# Altium PCB PCB1.PcbDoc (part 1 of 4)
Units mm, origin at the board's own origin, x right, y up, seen from the top; angles counter-clockwise.
Board outline 55.25 x 50.25 mm, 10 copper layers (Top Layer, GND L2, Layer 3, GND L4, PWR L5, PWR L6, GND L7, Layer 8, GND L9, Bottom Layer), stack 1.615 mm thick; 238 components, 362 nets, 1809 pads, 129 vias.
Unrouted connection lines stored in the file: 1070.
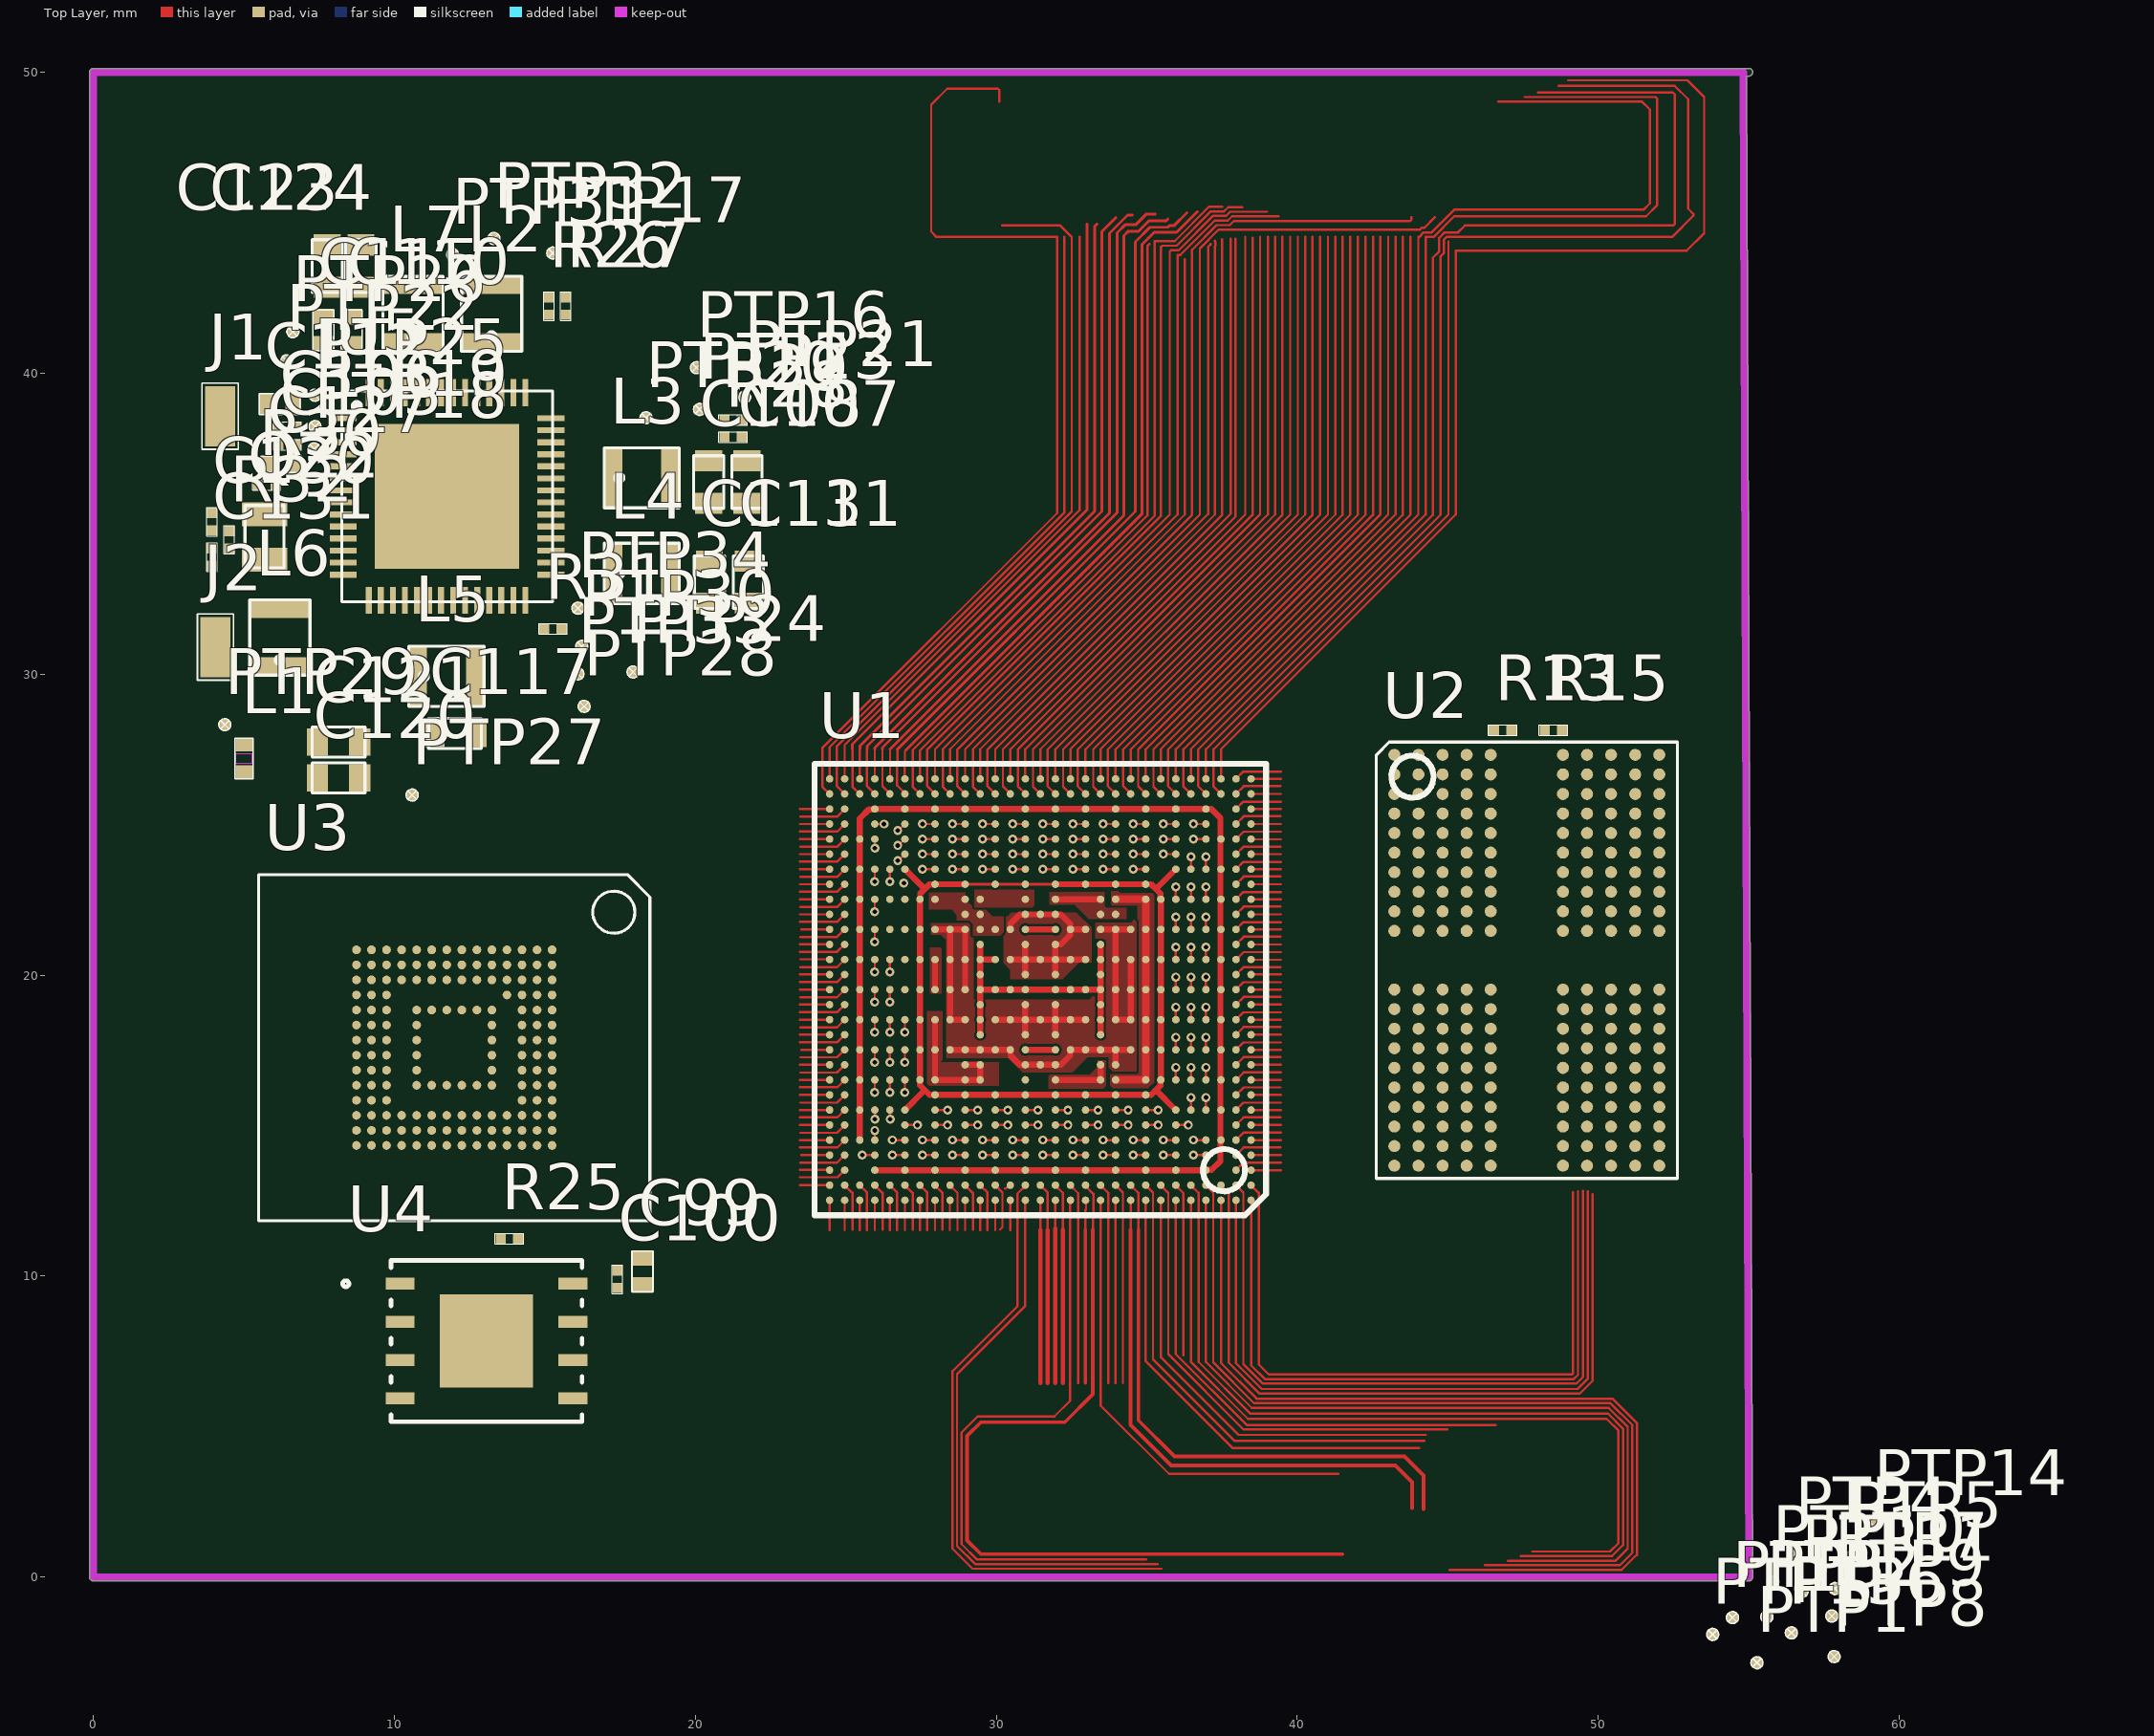
[diagram p0: Top Layer view]
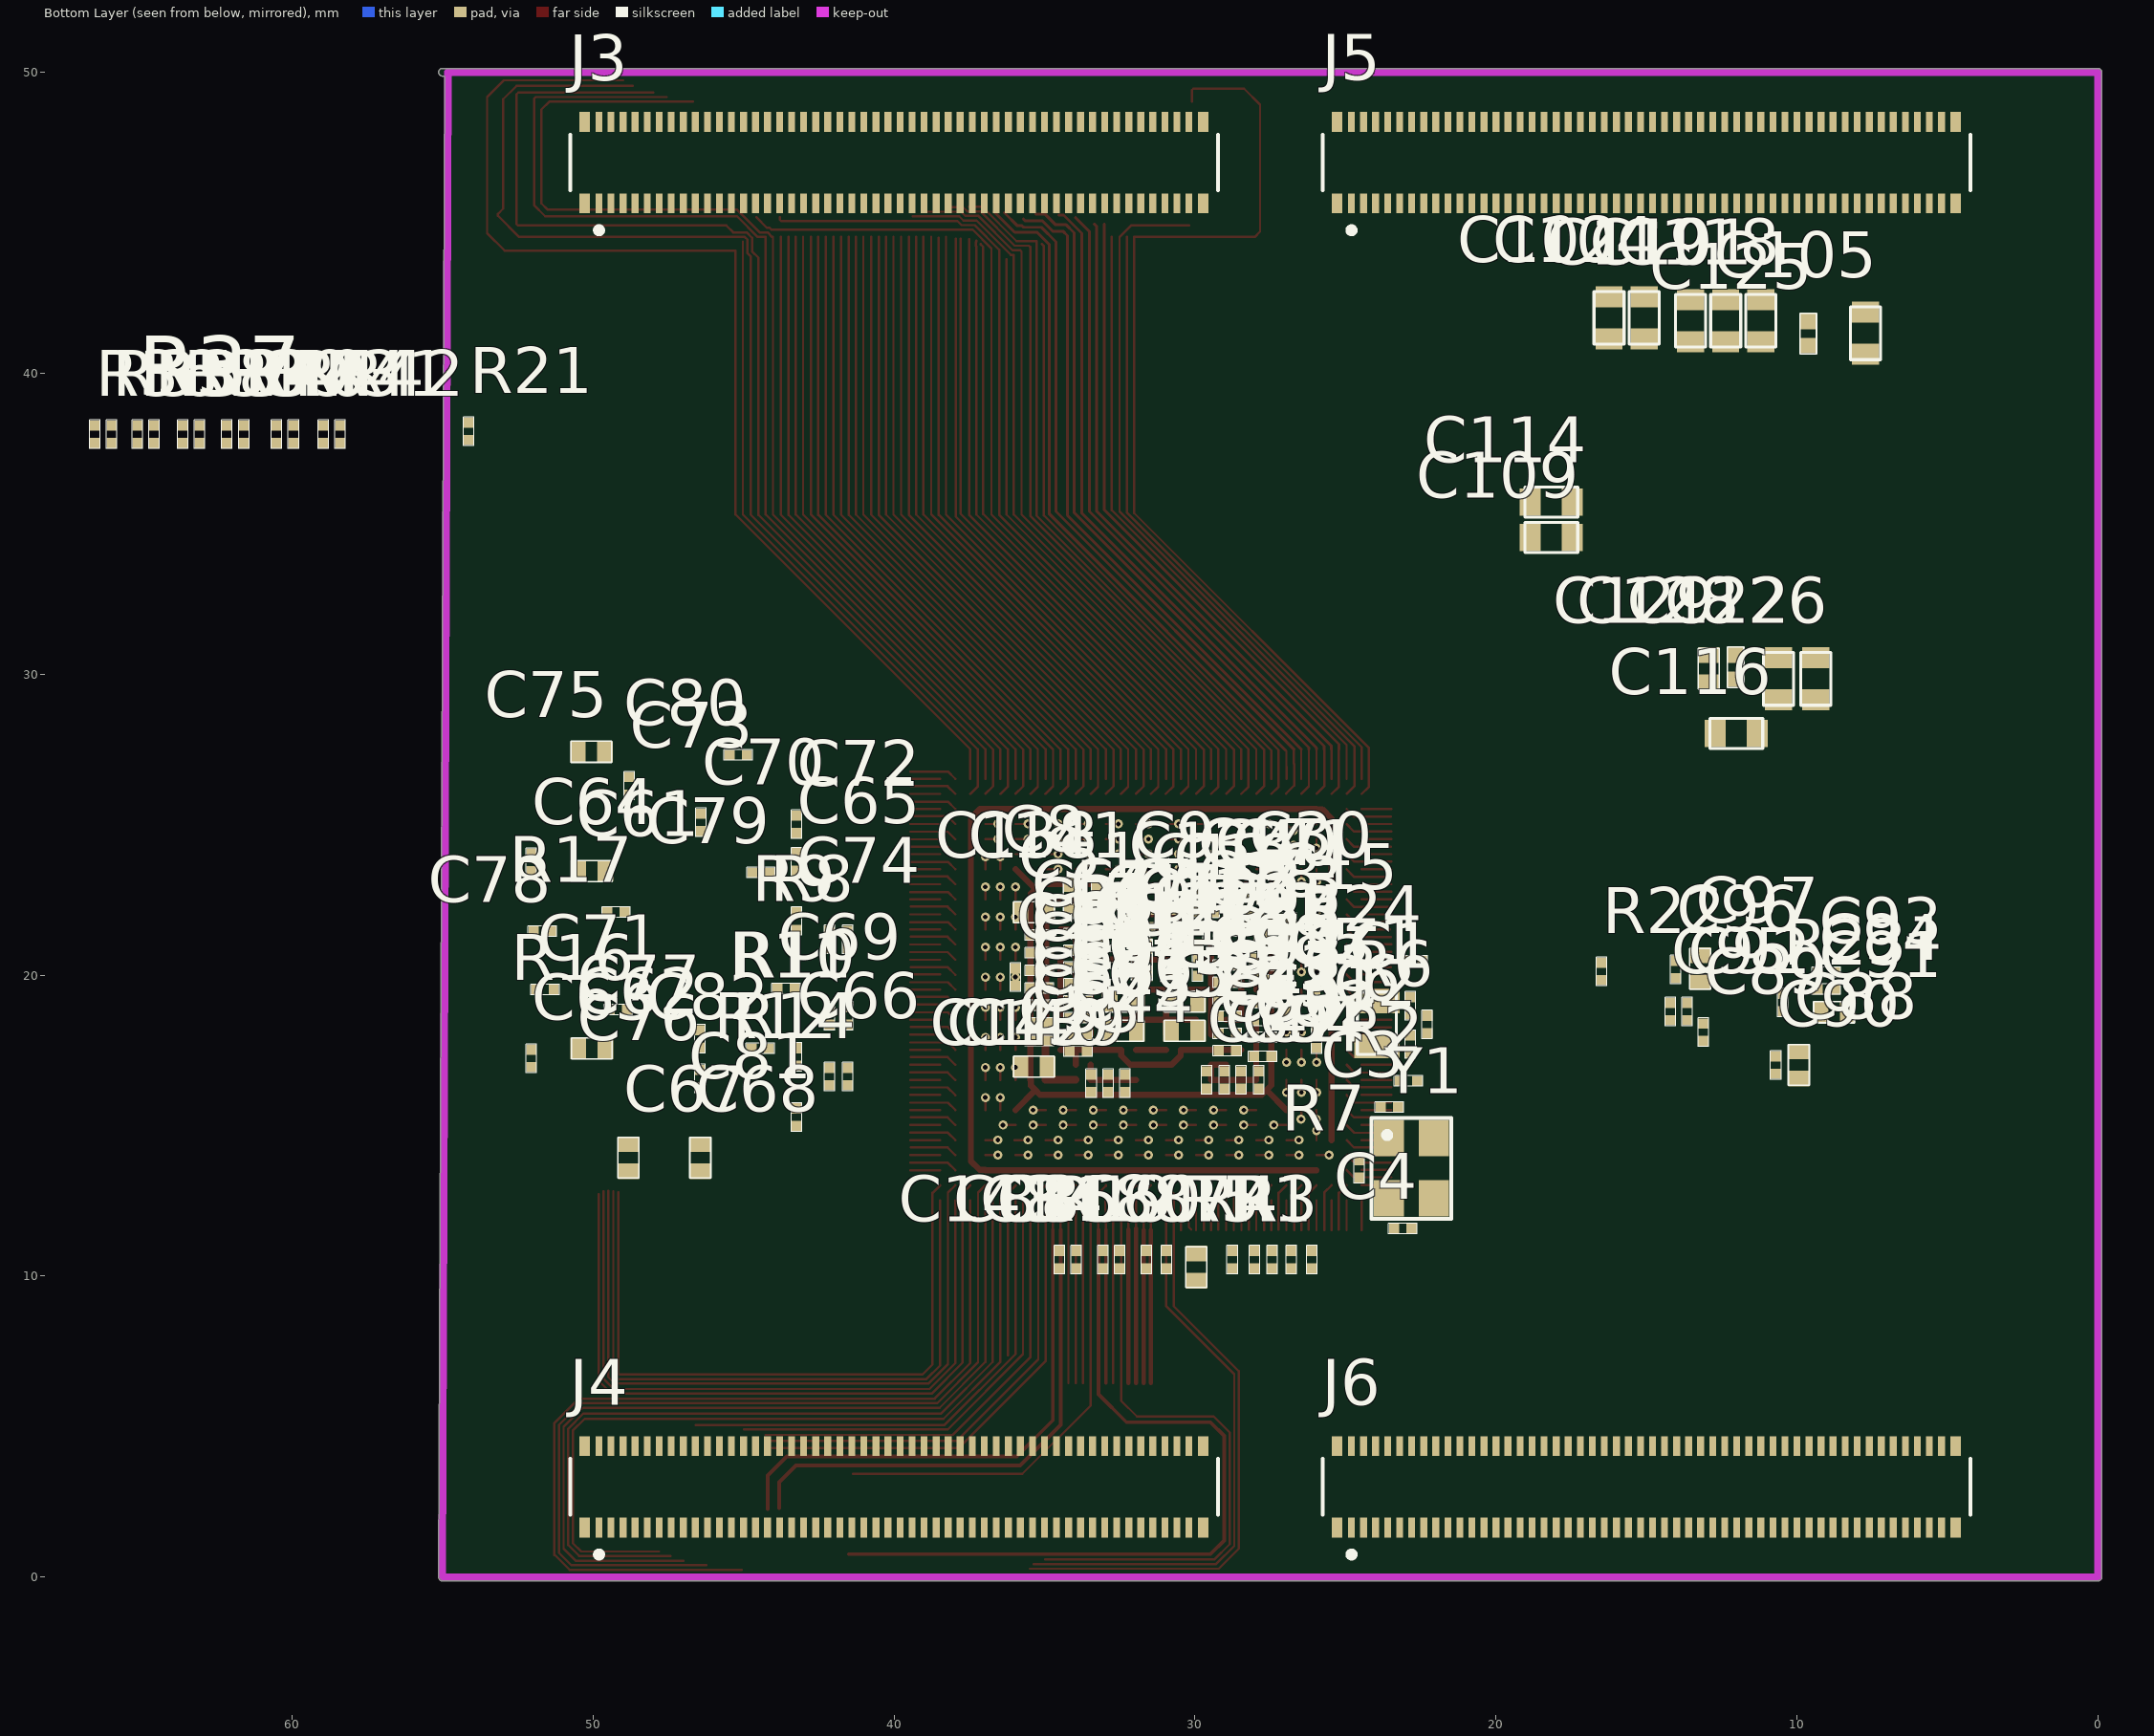
[diagram p1: Bottom Layer view, seen from below]

## Layer stack, top to bottom
Top Solder: solder mask 0.0102, Solder Resist, Dk 3.5
Top Layer: signal copper 0.035
Dielectric 2: prepreg 0.0784, PP-006, Dk 4.1
GND L2: signal copper 0.0152
Dielectric 3: core 0.25, PP-006, Dk 4.1
Layer 3: signal copper 0.0152
Dielectric 4: prepreg 0.0888, PP-006, Dk 4.1
GND L4: signal copper 0.0152
Dielectric 5: core 0.25, PP-006, Dk 4.1
PWR L5: signal copper 0.0152
Dielectric 1: prepreg 0.0888, FR-4, Dk 4.8
PWR L6: signal copper 0.0152
Dielectric 6: core 0.25, PP-006, Dk 4.1
GND L7: signal copper 0.0152
Dielectric 7: prepreg 0.0888, PP-006, Dk 4.1
Layer 8: signal copper 0.0152
Dielectric 8: core 0.25, PP-006, Dk 4.1
GND L9: signal copper 0.0152
Dielectric 9: prepreg 0.0784, PP-006, Dk 4.1
Bottom Layer: signal copper 0.035
Bottom Solder: solder mask 0.0102, Solder Resist, Dk 3.5

## Board outline
0,-0.127 cw(c0,0) -0.127,0 -0.127,50 cw(c0,50) 0,50.127 55,50.127 cw(c55,50) 55.127,50 cw(c55,50) 55,49.873 54.923,49.873 55.127,0.001 55.127,0 cw(c55,0) 55,-0.127

## Design rules (kind name [scope] priority, off if disabled: settings)
Clearance [All] p1: gap=0.076 ignorepadtopadclearanceinfootprint=FALSE except(0.2: Arc-Hole Track-Hole SMDPad-Hole THPad-Hole Via-Hole Fill-Hole Poly-Hole Region-Hole Text-Hole)
DiffPairsRouting DIFF_100 [InDifferentialPairClass('100')] p1: maxlimit=0.254 minlimit=0.127 mostfreqgap=0.254 toplayer_maxgap=0.127 toplayer_prefgap=0.127 toplayer_minwidth=0.094 toplayer_maxwidth=0.094 toplayer_prefwidth=0.094 midlayer2_maxgap=0.127 midlayer2_prefgap=0.127 midlayer2_minwidth=0.078 midlayer2_maxwidth=0.078 midlayer2_prefwidth=0.078 midlayer7_maxgap=0.127 midlayer7_prefgap=0.127 midlayer7_minwidth=0.078 midlayer7_maxwidth=0.078 midlayer7_prefwidth=0.078 bottomlayer_maxgap=0.127 bottomlayer_prefgap=0.127 bottomlayer_minwidth=0.094 bottomlayer_maxwidth=0.094 bottomlayer_prefwidth=0.094 impedanceprofiledriven=TRUE impedanceprofileid={C51C4587-37F8-4C0A-8CC7-DDA7A853E0E4} impedanceprofilevalue=100.000000 maxuncoupledlength=12.7
DiffPairsRouting DIFF_90 [InDifferentialPairClass('90')] p2: maxlimit=0.254 minlimit=0.127 mostfreqgap=0.254 toplayer_maxgap=0.127 toplayer_prefgap=0.127 toplayer_minwidth=0.121 toplayer_maxwidth=0.121 toplayer_prefwidth=0.121 midlayer2_maxgap=0.127 midlayer2_prefgap=0.127 midlayer2_minwidth=0.102 midlayer2_maxwidth=0.102 midlayer2_prefwidth=0.102 midlayer7_maxgap=0.127 midlayer7_prefgap=0.127 midlayer7_minwidth=0.102 midlayer7_maxwidth=0.102 midlayer7_prefwidth=0.102 bottomlayer_maxgap=0.127 bottomlayer_prefgap=0.127 bottomlayer_minwidth=0.121 bottomlayer_maxwidth=0.121 bottomlayer_prefwidth=0.121 impedanceprofiledriven=TRUE impedanceprofileid={1D29E53F-4908-4700-AD3D-521DF0D66675} impedanceprofilevalue=90.000000 maxuncoupledlength=12.7
DiffPairsRouting DIFF_85 [InDifferentialPairClass('85')] p3: maxlimit=0.254 minlimit=0.127 mostfreqgap=0.254 toplayer_maxgap=0.127 toplayer_prefgap=0.127 toplayer_minwidth=0.137 toplayer_maxwidth=0.137 toplayer_prefwidth=0.137 midlayer2_maxgap=0.127 midlayer2_prefgap=0.127 midlayer2_minwidth=0.117 midlayer2_maxwidth=0.117 midlayer2_prefwidth=0.117 midlayer7_maxgap=0.127 midlayer7_prefgap=0.127 midlayer7_minwidth=0.117 midlayer7_maxwidth=0.117 midlayer7_prefwidth=0.117 bottomlayer_maxgap=0.127 bottomlayer_prefgap=0.127 bottomlayer_minwidth=0.137 bottomlayer_maxwidth=0.137 bottomlayer_prefwidth=0.137 impedanceprofiledriven=TRUE impedanceprofileid={4B642B93-4FAB-42B8-9AE7-7EB7B3B48678} impedanceprofilevalue=85.000000 maxuncoupledlength=12.7
HoleSize [All] p1: absolutevalues=TRUE maxlimit=2.54 minlimit=0.15 maxpercent=80.000 minpercent=20.000
MatchedLengths "Schematic Matched Net Lengths_8" [InNetClass('USB')] p1: tolerance=0.3 checknetsindiffpair=TRUE checkdiffpairvsdiffpair=FALSE checkxsignals=FALSE checkothers=FALSE
MatchedLengths "Schematic Matched Net Lengths_1" [InNetClass('PCIe')] p2: tolerance=0.1 checknetsindiffpair=TRUE checkdiffpairvsdiffpair=FALSE checkxsignals=FALSE checkothers=FALSE
MatchedLengths "Schematic Matched Net Lengths" [InNetClass('HDMI')] p3: tolerance=0.1 checknetsindiffpair=TRUE checkdiffpairvsdiffpair=FALSE checkxsignals=FALSE checkothers=FALSE
PlaneClearance [All] p1: clearance=0.127
PlaneConnect [All] p1: planeconnectstyle=Direct reliefexpansion=0.508 reliefentries=4 reliefconductorwidth=0.254 reliefairgap=0.254
PolygonConnect [All] p1: connectstyle=Direct reliefconductorwidth=0.254 reliefentries=4 polygonreliefangle="90 Angle" airgapwidth=0.254
RoutingVias VIA_THRU [IsThruVia] p1: holewidth=0.2 width=0.4 viastyle="Through Hole" minholewidth=0.2 minwidth=0.4 maxholewidth=1 maxwidth=1.5
RoutingVias VIA_BURIED [IsBuriedVia] p2: holewidth=0.2 width=0.4 viastyle="Through Hole" minholewidth=0.2 minwidth=0.4 maxholewidth=0.5 maxwidth=1
RoutingVias VIA_MICRO [IsMicroVia] p3: holewidth=0.15 width=0.3 viastyle="Through Hole" minholewidth=0.15 minwidth=0.3 maxholewidth=0.15 maxwidth=0.3
SolderMaskExpansion [All] p1: expansion=0.102 istentingtop=FALSE
SupplyNets "Schematic Supply Nets_5" [InNet('5V0_SMPS')] p1: voltage=0.000
SupplyNets "Schematic Supply Nets_2" [InNet('VSYS_5V')] p2: voltage=0.000
SupplyNets "Schematic Supply Nets_1" [InNet('VSD_3V3')] p3: voltage=0.000
SupplyNets "Schematic Supply Nets_19" [InNet('NVCC_DRAM_1V1')] p4: voltage=0.000
SupplyNets "Schematic Supply Nets_18" [InNet('VDD_SNVS_0V8')] p5: voltage=0.000
SupplyNets "Schematic Supply Nets_17" [InNet('VDD_SOC')] p6: voltage=0.000
SupplyNets "Schematic Supply Nets_16" [InNet('VDD_3V3')] p7: voltage=0.000
SupplyNets "Schematic Supply Nets_15" [InNet('VDD_1V8')] p8: voltage=0.000
SupplyNets "Schematic Supply Nets_14" [InNet('GND')] p9: voltage=0.000
SupplyNets "Schematic Supply Nets_13" [InNet('VDD_ARM')] p10: voltage=0.000
SupplyNets "Schematic Supply Nets_12" [InNet('NVCC_SD2')] p11: voltage=0.000
SupplyNets "Schematic Supply Nets_11" [InNet('NVCC_SNVS_1V8')] p12: voltage=0.000
SupplyNets "Schematic Supply Nets_10" [InNet('VDDA_1V8')] p13: voltage=0.000
Width [All] p1: maxlimit=1.27 minlimit=0.076 preferedwidth=0.089
26 further rules are at their usual default settings.

## Classes and differential pairs
differential pair class 100: **LAN2_TXRXA **LAN2_TXRXB **LAN2_TXRXC **LAN2_TXRXD *LAN1_TXRXA *LAN1_TXRXB *LAN1_TXRXC *LAN1_TXRXD *LAN2_TXRXA *LAN2_TXRXB *LAN2_TXRXC *LAN2_TXRXD HDMI_TX0 HDMI_TX1 HDMI_TX2 HDMI_TXC LAN1_TXRXA LAN1_TXRXB LAN1_TXRXC LAN1_TXRXD LAN2_TXRXA LAN2_TXRXB LAN2_TXRXC LAN2_TXRXD
differential pair class 90: *PER1_TX1 *PER1_TX2 *PER2_TX1 *PER2_TX2 *USB_mPCIe PER1_RX1 PER1_RX2 PER1_TX1 PER1_TX2 PER2_RX1 PER2_RX2 PER2_TX1 PER2_TX2 USB1_D USB1_RX USB1_TX USB2_D USB2_HUB_UP USB2_RX USB2_TX USB_hub2 USB_hub3 USB_mPCIe
differential pair class 85: *mPCIe_CON_CLK *mPCIe_RX *mPCIe_TX DRAM_CK_A DRAM_CK_B DRAM_SDQS0_A DRAM_SDQS0_B DRAM_SDQS1_A DRAM_SDQS1_B mPCIe_CON_CLK mPCIe_RX mPCIe_TX PCIE_CLK PCIE_RX PCIE_TX
net class USB: USB1_D_N USB1_D_P USB1_RX_N USB1_RX_P USB1_TX_N USB1_TX_P USB2_D_N USB2_D_P USB2_RX_N USB2_RX_P USB2_TX_N USB2_TX_P
net class SINGLE: DRAM_CA0_A DRAM_CA0_B DRAM_CA1_A DRAM_CA1_B DRAM_CA2_A DRAM_CA2_B DRAM_CA3_A DRAM_CA3_B DRAM_CA4_A DRAM_CA4_B DRAM_CA5_A DRAM_CA5_B DRAM_CKE0_A DRAM_CKE0_B DRAM_CKE1_A DRAM_CKE1_B DRAM_DATA0_A DRAM_DATA0_B DRAM_DATA1_A DRAM_DATA1_B DRAM_DATA2_A DRAM_DATA2_B DRAM_DATA3_A DRAM_DATA3_B DRAM_DATA4_A DRAM_DATA4_B DRAM_DATA5_A DRAM_DATA5_B DRAM_DATA6_A DRAM_DATA6_B DRAM_DATA7_A DRAM_DATA7_B DRAM_DATA8_A DRAM_DATA8_B DRAM_DATA9_A DRAM_DATA9_B DRAM_DATA10_A DRAM_DATA10_B DRAM_DATA11_A DRAM_DATA11_B DRAM_DATA12_A DRAM_DATA12_B DRAM_DATA13_A DRAM_DATA13_B DRAM_DATA14_A DRAM_DATA14_B DRAM_DATA15_A DRAM_DATA15_B DRAM_DMI0_A DRAM_DMI0_B DRAM_DMI1_A DRAM_DMI1_B DRAM_nCS0_A DRAM_nCS0_B DRAM_nCS1_A DRAM_nCS1_B
net class SDIO: SD1_CLK SD1_CMD SD1_DATA0 SD1_DATA1 SD1_DATA2 SD1_DATA3 SD1_DATA4 SD1_DATA5 SD1_DATA6 SD1_DATA7 SD1_STROBE SD2_CLK SD2_CMD SD2_DATA0 SD2_DATA1 SD2_DATA2 SD2_DATA3
net class PCIe: PCIE_CLK_N PCIE_CLK_P PCIE_RX_N PCIE_RX_P PCIE_TX_N PCIE_TX_P
net class HDMI: HDMI_TX0_N HDMI_TX0_P HDMI_TX1_N HDMI_TX1_P HDMI_TX2_N HDMI_TX2_P HDMI_TXC_N HDMI_TXC_P
net class DRAM: DRAM_CK_A_N DRAM_CK_A_P DRAM_CK_B_N DRAM_CK_B_P DRAM_SDQS0_A_N DRAM_SDQS0_A_P DRAM_SDQS0_B_N DRAM_SDQS0_B_P DRAM_SDQS1_A_N DRAM_SDQS1_A_P DRAM_SDQS1_B_N DRAM_SDQS1_B_P
component class Interconnect: J3 J4 J5 J6
component class IMX8_PHY: C83 C84 C85 C143 R18 R19
component class IMX8_IO: C1 C2 C3 C4 PTP1 PTP2 PTP3 PTP4 PTP5 QZ1 R1 R2 R3 R4 R5 R6 R7 Y1
component class IMX8_INTERFACE: R33 R34 R35 R36 R37 R38 R39 R40 R41 R42 R43 R44
component class IMX8_DISPLAY: C87 R21
net class SEC: I2C1_SCL I2C1_SDA SD3_CLK SD3_CMD SD3_DATA0 SD3_DATA1 SD3_DATA2 SD3_DATA3 SD3_DATA4 SD3_DATA5 SD3_DATA6 SD3_DATA7
component class IMX8_LPDDR4: C61 C62 C63 C64 C65 C66 C67 C68 C69 C70 C71 C72 C73 C74 C75 C76 C77 C78 C79 C80 C81 C82 CR? F? PTP6 PTP7 PTP8 PTP9 PTP10 PTP11 R8 R9 R10 R11 R12 R13 R14 R15 R16 R17 U1 U2
component class IMX8_PMIC: C101 C102 C103 C104 C105 C106 C107 C108 C109 C110 C111 C112 C113 C114 C115 C116 C117 C118 C119 C120 C121 C122 C123 C124 C125 C126 C127 C128 C129 C130 C131 J1 J2 L1 L2 L3 L4 L5 L6 L7 PTP16 PTP17 PTP18 PTP19 PTP20 PTP21 PTP22 PTP23 PTP24 PTP25 PTP26 PTP27 PTP28 PTP29 PTP30 PTP31 PTP32 PTP33 PTP34 QZ2 R26 R27 R28 R29 R30 R31 R32 U5
component class IMX8_eMMC: C88 C89 C90 C91 C92 C93 C94 C95 C96 C97 C98 C99 C100 PTP14 PTP15 R22 R23 R24 R25 U3 U4
component class IMX8_PWR: C5 C6 C7 C8 C9 C10 C11 C12 C13 C14 C15 C16 C17 C18 C19 C20 C21 C22 C23 C24 C25 C26 C27 C28 C29 C30 C31 C32 C33 C34 C35 C36 C37 C38 C39 C40 C41 C42 C43 C44 C45 C46 C47 C48 C49 C50 C51 C52 C53 C54 C55 C56 C57 C58 C59 C60 C132 C133 C134 C135 C136 C137 C138 C139 C140 C141 C142
differential pair USB2_TX: +USB2_TX_P -USB2_TX_N
differential pair USB2_RX: +USB2_RX_P -USB2_RX_N
differential pair USB1_TX: +USB1_TX_P -USB1_TX_N
differential pair USB1_RX: +USB1_RX_P -USB1_RX_N
differential pair PCIE_TX: +PCIE_TX_P -PCIE_TX_N
differential pair PCIE_RX: +PCIE_RX_P -PCIE_RX_N
differential pair USB2_D: +USB2_D_P -USB2_D_N
differential pair USB1_D: +USB1_D_P -USB1_D_N
differential pair HDMI_TXC: +HDMI_TXC_P -HDMI_TXC_N
differential pair HDMI_TX2: +HDMI_TX2_P -HDMI_TX2_N
differential pair DRAM_SDQS1_B: +DRAM_SDQS1_B_P -DRAM_SDQS1_B_N
differential pair DRAM_SDQS1_A: +DRAM_SDQS1_A_P -DRAM_SDQS1_A_N
differential pair DRAM_SDQS0_A: +DRAM_SDQS0_A_P -DRAM_SDQS0_A_N
differential pair DRAM_CK_A: +DRAM_CK_A_P -DRAM_CK_A_N
differential pair PCIE_CLK: +PCIE_CLK_P -PCIE_CLK_N
differential pair HDMI_TX1: +HDMI_TX1_P -HDMI_TX1_N
differential pair HDMI_TX0: +HDMI_TX0_P -HDMI_TX0_N
differential pair DRAM_SDQS0_B: +DRAM_SDQS0_B_P -DRAM_SDQS0_B_N
differential pair DRAM_CK_B: +DRAM_CK_B_P -DRAM_CK_B_N

## Components (designator, comment, footprint, x,y, rotation, side; value= is the part's Value field where it differs from the comment)
C1 "CAP_0201_12pF_RF_MATCHING" CAP_0201_UN1Q 22.84,18.982 r90 bottom value=12pF
C2 "CAP_0201_12pF_RF_MATCHING" CAP_0201_UN1Q 22.84,17.701 r90 bottom value=12pF
C3 "CAP_0201_12pF_RF_MATCHING" CAP_0201_UN1Q 23.536,15.618 r180 bottom value=12pF
C4 "CAP_0201_12pF_RF_MATCHING" CAP_0201_UN1Q 23.094,11.58 r0 bottom value=12pF
C5 "CAP_0201_1uF_X6S" CAP_0201_UN1Q 26.961,19.105 r90 bottom value=1uF
C6 "CAP_0201_1uF_X6S" CAP_0201_UN1Q 25.951,17.872 r90 bottom value=1uF
C7 "CAP_0201_1uF_X6S" CAP_0201_UN1Q 27.881,16.511 r90 bottom value=1uF
C8 "CAP_0402_10u_X6S" CAP_0402_H09W07_UN1Q 34.028,22.571 r270 bottom value=10uF
C9 "CAP_0201_220n_10V_X6S" CAP_0201_UN1Q 32.097,22.622 r270 bottom value=220nF
C10 "CAP_0402_10u_X6S" CAP_0402_H09W07_UN1Q 31.767,20.514 r90 bottom value=10uF
C11 "CAP_0201_1uF_X6S" CAP_0201_UN1Q 32.783,20.031 r180 bottom value=1uF
C12 "CAP_0201_1uF_X6S" CAP_0201_UN1Q 32.783,20.59 r180 bottom value=1uF
C13 "CAP_0201_1uF_X6S" CAP_0201_UN1Q 31.504,21.886 r90 bottom value=1uF
C14 "CAP_0201_1uF_X6S" CAP_0201_UN1Q 32.783,21.174 r180 bottom value=1uF
C15 "CAP_0201_220n_10V_X6S" CAP_0201_UN1Q 27.094,21.886 r180 bottom value=220nF
C16 "CAP_0402_10u_X6S" CAP_0402_H09W07_UN1Q 30.726,20.514 r90 bottom value=10uF
C17 "CAP_0201_1uF_X6S" CAP_0201_UN1Q 29.913,22.394 r270 bottom value=1uF
C18 "CAP_0201_1uF_X6S" CAP_0201_UN1Q 29.913,21.327 r90 bottom value=1uF
C19 "CAP_0201_1uF_X6S" CAP_0201_UN1Q 30.726,21.886 r90 bottom value=1uF
C20 "CAP_0201_1uF_X6S" CAP_0201_UN1Q 29.913,20.26 r90 bottom value=1uF
C21 "CAP_0201_1uF_X6S" CAP_0201_UN1Q 35.967,19.936 r270 bottom value=1uF
C22 "CAP_0402_10u_X6S" CAP_0402_H09W07_UN1Q 30.345,18.152 r0 bottom value=10uF
C23 "CAP_0201_1uF_X6S" CAP_0201_UN1Q 28.922,21.454 r180 bottom value=1uF
C24 "CAP_0201_1uF_X6S" CAP_0201_UN1Q 28.922,20.326 r180 bottom value=1uF
C25 "CAP_0201_1uF_X6S" CAP_0201_UN1Q 28.922,20.89 r180 bottom value=1uF
C26 "CAP_0402_10u_X6S" CAP_0402_H09W07_UN1Q 30.345,19.117 r0 bottom value=10uF
C27 "CAP_0201_1uF_X6S" CAP_0201_UN1Q 28.922,18.634 r180 bottom value=1uF
C28 "CAP_0201_1uF_X6S" CAP_0201_UN1Q 28.922,19.198 r180 bottom value=1uF
C29 "CAP_0201_1uF_X6S" CAP_0201_UN1Q 28.922,19.762 r180 bottom value=1uF
C30 "CAP_0402_10u_X6S" CAP_0402_H09W07_UN1Q 28.033,22.368 r270 bottom value=10uF
C31 "CAP_0201_1uF_X6S" CAP_0201_UN1Q 27.745,17.933 r0 bottom value=1uF
C32 "CAP_0201_1uF_X6S" CAP_0201_UN1Q 27.745,17.298 r0 bottom value=1uF
C33 "CAP_0201_1uF_X6S" CAP_0201_UN1Q 27.745,18.492 r0 bottom value=1uF
C34 "CAP_0201_1uF_X6S" CAP_0201_UN1Q 28.465,16.511 r90 bottom value=1uF
C35 "CAP_0402_10u_X6S" CAP_0402_H09W07_UN1Q 32.377,18.152 r180 bottom value=10uF
C36 "CAP_0201_1uF_X6S" CAP_0201_UN1Q 33.875,20.26 r0 bottom value=1uF
C37 "CAP_0201_1uF_X6S" CAP_0201_UN1Q 33.875,19.142 r0 bottom value=1uF
C38 "CAP_0201_1uF_X6S" CAP_0201_UN1Q 33.875,19.701 r0 bottom value=1uF
C39 "CAP_0201_1uF_X6S" CAP_0201_UN1Q 29.608,16.511 r90 bottom value=1uF
C40 "CAP_0201_1uF_X6S" CAP_0201_UN1Q 29.354,22.368 r270 bottom value=1uF
C41 "CAP_0201_1uF_X6S" CAP_0201_UN1Q 28.795,22.368 r270 bottom value=1uF
C42 "CAP_0201_1uF_X6S" CAP_0201_UN1Q 29.024,16.511 r90 bottom value=1uF
C43 "CAP_0402_10u_X6S" CAP_0402_H09W07_UN1Q 32.377,19.117 r180 bottom value=10uF
C44 "CAP_0201_1uF_X6S" CAP_0201_UN1Q 33.875,17.466 r0 bottom value=1uF
C45 "CAP_0201_1uF_X6S" CAP_0201_UN1Q 33.875,18.025 r0 bottom value=1uF
C46 "CAP_0201_1uF_X6S" CAP_0201_UN1Q 33.875,18.584 r0 bottom value=1uF
C47 "CAP_0201_1uF_X6S" CAP_0201_UN1Q 33.875,21.378 r0 bottom value=1uF
C48 "CAP_0201_1uF_X6S" CAP_0201_UN1Q 28.922,18.05 r180 bottom value=1uF
C49 "CAP_0201_1uF_X6S" CAP_0201_UN1Q 33.875,20.819 r0 bottom value=1uF
C50 "CAP_0201_1uF_X6S" CAP_0201_UN1Q 28.922,17.481 r180 bottom value=1uF
C51 "CAP_0402_10u_X6S" CAP_0402_H09W07_UN1Q 35.349,22.089 r180 bottom value=10uF
C52 "CAP_0201_1uF_X6S" CAP_0201_UN1Q 35.168,17.819 r180 bottom value=1uF
C53 "CAP_0201_1uF_X6S" CAP_0201_UN1Q 35.168,20.156 r180 bottom value=1uF
C54 "CAP_0201_1uF_X6S" CAP_0201_UN1Q 35.168,19.572 r180 bottom value=1uF
C55 "CAP_0402_10u_X6S" CAP_0402_H09W07_UN1Q 35.349,16.958 r180 bottom value=10uF
C56 "CAP_0201_1uF_X6S" CAP_0201_UN1Q 35.168,18.404 r180 bottom value=1uF
C57 "CAP_0201_1uF_X6S" CAP_0201_UN1Q 35.168,21.325 r180 bottom value=1uF
C58 "CAP_0201_1uF_X6S" CAP_0201_UN1Q 35.168,20.74 r180 bottom value=1uF
C59 "CAP_0201_1uF_X6S" CAP_0201_UN1Q 35.168,18.988 r180 bottom value=1uF
C60 "CAP_0402_4u7_10V_X6S" CAP_0402_H09W07_UN1Q 29.952,10.299 r90 bottom value=4.7uF
C61 "CAP_0402_10u_X6S" CAP_0402_H09W07_UN1Q 50.041,23.458 r0 bottom value=10uF
C62 "CAP_0402_10u_X6S" CAP_0402_H09W07_UN1Q 50.041,17.565 r0 bottom value=10uF
C63 "CAP_0201_1uF_X6S" CAP_0201_UN1Q 52.048,17.235 r90 bottom value=1uF
C64 "CAP_0201_1uF_X6S" CAP_0201_UN1Q 52.048,23.747 r270 bottom value=1uF
C65 "CAP_0201_1uF_X6S" CAP_0201_UN1Q 43.234,23.762 r270 bottom value=1uF
C66 "CAP_0201_1uF_X6S" CAP_0201_UN1Q 43.234,17.285 r90 bottom value=1uF
C67 "CAP_0402_10u_X6S" CAP_0402_H09W07_UN1Q 48.822,13.933 r270 bottom value=10uF
C68 "CAP_0402_10u_X6S" CAP_0402_H09W07_UN1Q 46.435,13.933 r270 bottom value=10uF
C69 "CAP_0201_1uF_X6S" CAP_0201_UN1Q 43.59,19.546 r0 bottom value=1uF
C70 "CAP_0201_1uF_X6S" CAP_0201_UN1Q 46.409,25.073 r270 bottom value=1uF
C71 "CAP_0201_1uF_X6S" CAP_0201_UN1Q 51.591,19.521 r180 bottom value=1uF
C72 "CAP_0201_1uF_X6S" CAP_0201_UN1Q 43.234,25.007 r270 bottom value=1uF
C73 "CAP_0201_1uF_X6S" CAP_0201_UN1Q 48.797,26.292 r270 bottom value=1uF
C74 "CAP_0201_1uF_X6S" CAP_0201_UN1Q 43.234,21.796 r90 bottom value=1uF
C75 "CAP_0402_10u_X6S" CAP_0402_H09W07_UN1Q 50.049,27.42 r0 bottom value=10uF
C76 "CAP_0201_1uF_X6S" CAP_0201_UN1Q 46.435,16.564 r270 bottom value=1uF
C77 "CAP_0201_1uF_X6S" CAP_0201_UN1Q 46.435,17.88 r270 bottom value=1uF
C78 "CAP_0201_1uF_X6S" CAP_0201_UN1Q 51.678,21.451 r180 bottom value=1uF
C79 "CAP_0201_1uF_X6S" CAP_0201_UN1Q 44.417,23.407 r0 bottom value=1uF
C80 "CAP_0201_1uF_X6S" CAP_0201_UN1Q 45.175,27.318 r180 bottom value=1uF
C81 "CAP_0201_1uF_X6S" CAP_0201_UN1Q 43.234,15.279 r270 bottom value=1uF
C82 "CAP_0201_1uF_X6S" CAP_0201_UN1Q 44.443,17.565 r0 bottom value=1uF
C83 "CAP_0201_220n_10V_X6S" CAP_0201_UN1Q 33.94,10.549 r90 bottom value=220nF
C84 "CAP_0201_220n_10V_X6S" CAP_0201_UN1Q 33.051,10.549 r270 bottom value=220nF
C85 "CAP_0201_220n_10V_X6S" CAP_0201_UN1Q 32.492,10.549 r270 bottom value=220nF
C87 "CAP_0201_2n2" CAP_0201_UN1Q 28.758,10.549 r90 bottom value=2.2nF
C88 "CAP_0402_4u7_10V_X6S" CAP_0402_H09W07_UN1Q 9.939,17.013 r270 bottom value=4.7uF
C89 "CAP_0201_220n_10V_X6S" CAP_0201_UN1Q 13.114,18.105 r90 bottom value=220nF
C90 "CAP_0201_220n_10V_X6S" CAP_0201_UN1Q 10.701,17.013 r270 bottom value=220nF
C91 "CAP_0402_10u_X6S" CAP_0402_H09W07_UN1Q 8.771,18.765 r180 bottom value=10uF
C92 "CAP_0201_220n_10V_X6S" CAP_0201_UN1Q 13.648,18.791 r270 bottom value=220nF
C93 "CAP_0201_220n_10V_X6S" CAP_0201_UN1Q 9.021,20.086 r0 bottom value=220nF
C94 "CAP_0201_220n_10V_X6S" CAP_0201_UN1Q 9.021,19.527 r0 bottom value=220nF
C95 "CAP_0201_220n_10V_X6S" CAP_0201_UN1Q 14.207,18.791 r270 bottom value=220nF
C96 "CAP_0201_220n_10V_X6S" CAP_0201_UN1Q 14.029,20.188 r90 bottom value=220nF
C97 "CAP_0402_10u_X6S" CAP_0402_H09W07_UN1Q 13.216,20.213 r270 bottom value=10uF
C98 "CAP_0201_18p_RF_MATCHING" CAP_0201_UN1Q 25.71,19.504 r0 bottom value=18pF
C99 "CAP_0402_10u_X6S" CAP_0402_H09W07_UN1Q 18.245,10.151 r90 top value=10uF
C100 "CAP_0201_220n_10V_X6S" CAP_0201_UN1Q 17.407,9.901 r90 top value=220nF
C101 "CAP_0603_10u_10V_X7R" CAP_0603_UN1Q 12.37,41.744 r270 bottom value=10uF
C102 "CAP_0603_NA" CAP_0603_UN1Q 16.242,41.836 r270 bottom value=NA
C103 "CAP_0201_1uF_X6S" CAP_0201_UN1Q 6.446,37.629 r180 top value=1uF
C104 "CAP_0603_22u_6.3V_X6S" CAP_0603_UN1Q 15.074,41.836 r90 bottom value=22uF
C105 "CAP_0603_10u_10V_X7R" CAP_0603_UN1Q 7.722,41.326 r270 bottom value=10uF
C106 "CAP_0201_1uF_X6S" CAP_0201_UN1Q 6.446,38.213 r180 top value=1uF
C107 "CAP_0603_NA" CAP_0603_UN1Q 21.715,36.384 r270 top value=NA
C108 "CAP_0603_22u_6.3V_X6S" CAP_0603_UN1Q 20.445,36.384 r90 top value=22uF
C109 "CAP_0603_10u_10V_X7R" CAP_0603_UN1Q 18.161,34.544 r180 bottom value=10uF
C110 "CAP_0402_10u_X6S" CAP_0402_H09W07_UN1Q 8.585,41.427 r90 top value=10uF
C111 "CAP_0603_NA" CAP_0603_UN1Q 21.766,33.056 r90 top value=NA
C112 "CAP_0402_4u7_10V_X6S" CAP_0402_H09W07_UN1Q 6.196,38.975 r0 top value=4.7uF
C113 "CAP_0603_22u_6.3V_X6S" CAP_0603_UN1Q 20.47,33.056 r270 top value=22uF
C114 "CAP_0603_10u_10V_X7R" CAP_0603_UN1Q 18.161,35.712 r180 bottom value=10uF
C115 "CAP_0402_4u7_10V_X6S" CAP_0402_H09W07_UN1Q 7.645,41.427 r270 top value=4.7uF
C116 "CAP_0603_NA" CAP_0603_UN1Q 12.014,28.028 r180 bottom value=NA
C117 "CAP_0603_22u_6.3V_X6S" CAP_0603_UN1Q 12.014,28.028 r0 top value=22uF
C118 "CAP_0603_10u_10V_X7R" CAP_0603_UN1Q 11.199,41.744 r270 bottom value=10uF
C119 "CAP_0603_10u_10V_X7R" CAP_0603_UN1Q 13.538,41.744 r270 bottom value=10uF
C120 "CAP_0603_NA" CAP_0603_UN1Q 8.151,26.555 r180 top value=NA
C121 "CAP_0603_22u_6.3V_X6S" CAP_0603_UN1Q 8.151,27.748 r0 top value=22uF
C122 "CAP_0603_10u_10V_X7R" CAP_0603_UN1Q 10.617,29.845 r90 bottom value=10uF
C123 "CAP_0603_NA" CAP_0603_UN1Q 7.772,43.561 r270 top value=NA
C124 "CAP_0603_22u_6.3V_X6S" CAP_0603_UN1Q 8.89,43.561 r90 top value=22uF
C125 "CAP_0402_1uF_10V_X7R" CAP_0402_UN1Q 9.627,41.319 r270 bottom value=1uF
C126 "CAP_0603_10u_10V_X7R" CAP_0603_UN1Q 9.373,29.845 r90 bottom value=10uF
C127 "CAP_0402_1uF_10V_X7R" CAP_0402_UN1Q 6.246,36.969 r0 top value=1uF
C128 "CAP_0402_1uF_10V_X7R" CAP_0402_UN1Q 12.04,30.232 r90 bottom value=1uF
C129 "CAP_0402_4u7_10V_X6S" CAP_0402_H09W07_UN1Q 12.929,30.182 r270 bottom value=4.7uF
C130 "CAP_0201_12pF_RF_MATCHING" CAP_0201_UN1Q 3.939,35.069 r90 top value=12pF
C131 "CAP_0201_12pF_RF_MATCHING" CAP_0201_UN1Q 3.939,33.885 r270 top value=12pF
C132 "CAP_0402_10u_X6S" CAP_0402_H09W07_UN1Q 27.348,21.174 r0 bottom value=10uF
C133 "CAP_0201_1uF_X6S" CAP_0201_UN1Q 27.119,22.597 r0 bottom value=1uF
C134 "CAP_0201_1uF_X6S" CAP_0201_UN1Q 27.195,20.336 r180 bottom value=1uF
C135 "CAP_0201_1uF_X6S" CAP_0201_UN1Q 27.745,19.066 r0 bottom value=1uF
C136 "CAP_0201_1uF_X6S" CAP_0201_UN1Q 27.195,19.828 r180 bottom value=1uF
C137 "CAP_0201_1uF_X6S" CAP_0201_UN1Q 28.008,20.26 r90 bottom value=1uF
C138 "CAP_0201_1uF_X6S" CAP_0201_UN1Q 33.266,22.622 r270 bottom value=1uF
C139 "CAP_0201_1uF_X6S" CAP_0201_UN1Q 32.326,16.399 r90 bottom value=1uF
C140 "CAP_0201_1uF_X6S" CAP_0201_UN1Q 32.885,16.399 r90 bottom value=1uF
C141 "CAP_0201_1uF_X6S" CAP_0201_UN1Q 32.682,22.622 r270 bottom value=1uF
C142 "CAP_0201_1uF_X6S" CAP_0201_UN1Q 33.444,16.399 r90 bottom value=1uF
C143 "CAP_0201_220n_10V_X6S" CAP_0201_UN1Q 34.499,10.549 r270 bottom value=220nF
J1 "PAD 1 x 2 mm" TP_1X2MM_UN1Q 4.211,38.573 r0 top
J2 "PAD 1 x 2 mm" TP_1X2MM_UN1Q 4.059,30.902 r0 top
J3 "DF40C-100DP-0.4V(51)" HIROSE_DF40C-100DP-0.4V(51) 40,47 r180 bottom
J4 "DF40C-100DP-0.4V(51)" HIROSE_DF40C-100DP-0.4V(51) 40,3 r180 bottom
J5 "DF40C-100DP-0.4V(51)" HIROSE_DF40C-100DP-0.4V(51) 15,47 r180 bottom
J6 "DF40C-100DP-0.4V(51)" HIROSE_DF40C-100DP-0.4V(51) 15,3 r180 bottom locked
L1 "FERRITE_0402_BLM15KD" FERR_BLM15KD 5.004,27.203 r90 top value=30R@100MHz
L2 "IND_VLS2520_0u47" IND_VLS2520 13.233,41.976 r90 top value=0.47uH
L3 "IND_VLS2520_0u47" IND_VLS2520 18.222,36.525 r0 top value=0.47uH
L4 "IND_VLS2520_0u47" IND_VLS2520 18.222,33.35 r0 top value=0.47uH
L5 "IND_VLS2520_0u47" IND_VLS2520 11.733,29.933 r0 top value=0.47uH
L6 "IND_VLS2520_0u47" IND_VLS2520 6.198,31.217 r90 top value=0.47uH
L7 "IND_VLS2520_0u47" IND_VLS2520 10.617,41.976 r90 top value=0.47uH
PTP1 "PTP_0.4mm" PTP_0.4MM 55.27,-2.845 r90 top
PTP2 "PTP_0.4mm" PTP_0.4MM 55.601,-1.321 r90 top
PTP3 "PTP_0.4mm" PTP_0.4MM 54.458,-1.346 r90 top
PTP4 "PTP_0.4mm" PTP_0.4MM 56.54,0.787 r90 top
PTP5 "PTP_0.4mm" PTP_0.4MM 58.318,0.635 r90 top
PTP6 "PTP_0.4mm" PTP_0.4MM 56.413,-1.854 r90 top
PTP7 "PTP_0.4mm" PTP_0.4MM 57.861,-0.381 r90 top
PTP8 "PTP_0.4mm" PTP_0.4MM 57.836,-2.642 r90 top
PTP9 "PTP_0.4mm" PTP_0.4MM 57.76,-1.295 r90 top
PTP10 "PTP_0.4mm" PTP_0.4MM 55.804,-0.152 r90 top
PTP11 "PTP_0.4mm" PTP_0.4MM 56.769,-0.483 r90 top
PTP14 "PTP_0.4mm" PTP_0.4MM 59.157,1.702 r90 top
PTP15 "PTP_0.4mm" PTP_0.4MM 53.797,-1.905 r90 top
PTP16 "PTP_0.4mm" PTP_0.4MM 20.041,40.183 r90 top
PTP17 "PTP_0.4mm" PTP_0.4MM 15.265,43.993 r90 top
PTP18 "PTP_0.4mm" PTP_0.4MM 7.341,37.49 r90 top
PTP19 "PTP_0.4mm" PTP_0.4MM 7.366,38.227 r90 top
PTP20 "PTP_0.4mm" PTP_0.4MM 18.362,38.518 r90 top
PTP21 "PTP_0.4mm" PTP_0.4MM 21.639,39.204 r90 top
PTP22 "PTP_0.4mm" PTP_0.4MM 6.426,40.411 r90 top
PTP23 "PTP_0.4mm" PTP_0.4MM 20.14,38.797 r90 top
PTP24 "PTP_0.4mm" PTP_0.4MM 17.932,30.074 r90 top
PTP25 "PTP_0.4mm" PTP_0.4MM 7.366,39.268 r90 top
PTP26 "PTP_0.4mm" PTP_0.4MM 6.629,41.377 r90 top
PTP27 "PTP_0.4mm" PTP_0.4MM 10.592,25.984 r90 top
PTP28 "PTP_0.4mm" PTP_0.4MM 16.307,28.931 r90 top
PTP29 "PTP_0.4mm" PTP_0.4MM 4.369,28.321 r90 top
PTP30 "PTP_0.4mm" PTP_0.4MM 16.229,30.923 r90 top
PTP31 "PTP_0.4mm" PTP_0.4MM 11.938,43.942 r90 top
PTP32 "PTP_0.4mm" PTP_0.4MM 13.31,44.475 r90 top
PTP33 "PTP_0.4mm" PTP_0.4MM 16.102,30.009 r90 top
PTP34 "PTP_0.4mm" PTP_0.4MM 16.102,32.193 r90 top
QZ1 "XTAL_CM8V-T1A-32_768KHZ-9PF-20PPM-TA-QC" CM8V32768TA020125_MC 23.958,18.387 r270 bottom value="32.768 kHz"
QZ2 "XTAL_CM8V-T1A-32_768KHZ-9PF-20PPM-TA-QC" CM8V32768TA020125_MC 5.69,34.557 r270 top value="32.768 kHz"
R1 "RES_0201_NA" RES_0201_UN1Q 26.802,10.549 r90 bottom value=NA
R2 "RES_0201_100k" RES_0201_UN1Q 22.901,16.482 r0 bottom value=100k
R3 "RES_0201_100k" RES_0201_UN1Q 26.117,10.549 r90 bottom value=100k
R4 "RES_0201_10k" RES_0201_UN1Q 27.437,10.549 r270 bottom value=10k
R5 "RES_0201_NA" RES_0201_UN1Q 28.022,10.549 r270 bottom value=NA
R6 "RES_0201_4M7" RES_0201_UN1Q 22.281,18.361 r270 bottom value=4M7
R7 "RES_0201_510k" RES_0201_UN1Q 24.542,13.561 r270 bottom value=510k
R8 "RES_0201_NA" RES_0201_UN1Q 41.534,21.181 r90 bottom value=NA
R9 "RES_0201_NA" RES_0201_UN1Q 42.144,21.181 r90 bottom value=NA
R10 "RES_0201_NA" RES_0201_UN1Q 41.534,18.641 r270 bottom value=NA
R11 "RES_0201_NA" RES_0201_UN1Q 42.144,18.641 r270 bottom value=NA
R12 "RES_0201_10k" RES_0201_UN1Q 42.144,16.634 r90 bottom value=10k
R13 "RES_0201_240R" RES_0201_UN1Q 46.818,28.14 r180 top value=240R
R14 "RES_0201_240R" RES_0201_UN1Q 41.534,16.634 r90 bottom value=240R
R15 "RES_0201_240R" RES_0201_UN1Q 48.509,28.14 r0 top value=240R
R16 "RES_0201_NA" RES_0201_UN1Q 49.154,18.844 r180 bottom value=NA
R17 "RES_0201_NA" RES_0201_UN1Q 49.231,22.095 r180 bottom value=NA
R18 "RES_0201_200R" RES_0201_UN1Q 31.603,10.549 r90 bottom value=200R
R19 "RES_0201_8k2" RES_0201_UN1Q 30.943,10.549 r90 bottom value=8k2
R21 "RES_0201_8k2" RES_0201_UN1Q 54.133,38.072 r90 bottom value=8k2
R22 "RES_0201_NA" RES_0201_UN1Q 16.493,20.126 r90 bottom value=NA
R23 "RES_0201_NA" RES_0201_UN1Q 10.473,19.085 r90 bottom value=NA
R24 "RES_0201_NA" RES_0201_UN1Q 22.738,20.47 r180 bottom value=NA
R25 "10k" RES_0201_UN1Q 13.826,11.247 r0 top
R26 "RES_0201_NA" RES_0201_UN1Q 15.138,42.23 r90 top value=NA
R27 "RES_0201_0R" RES_0201_UN1Q 15.697,42.23 r90 top value=0R
R28 "RES_0201_NA" RES_0201_UN1Q 21.258,37.883 r0 top value=NA
R29 "RES_0201_0R" RES_0201_UN1Q 21.258,38.442 r0 top value=0R
R30 "RES_0201_100k" RES_0201_UN1Q 5.764,36.283 r0 top value=100k
R31 "RES_0201_100k" RES_0201_UN1Q 15.274,31.508 r180 top value=100k
R32 "RES_0201_NA" RES_0201_UN1Q 4.523,34.47 r270 top value=NA
R33 "RES_0201_4k7" RES_0201_UN1Q 63.632,37.97 r90 bottom value=4k7
R34 "RES_0201_4k7" RES_0201_UN1Q 63.074,37.97 r90 bottom value=4k7
R35 "RES_0201_4k7" RES_0201_UN1Q 65.995,37.97 r90 bottom value=4k7
R36 "RES_0201_4k7" RES_0201_UN1Q 66.553,37.97 r90 bottom value=4k7
R37 "RES_0201_4k7" RES_0201_UN1Q 65.131,37.97 r90 bottom value=4k7
R38 "RES_0201_4k7" RES_0201_UN1Q 64.572,37.97 r90 bottom value=4k7
R39 "RES_0201_4k7" RES_0201_UN1Q 62.159,37.97 r90 bottom value=4k7
R40 "RES_0201_4k7" RES_0201_UN1Q 61.6,37.97 r90 bottom value=4k7
R41 "RES_0201_4k7" RES_0201_UN1Q 58.959,37.97 r90 bottom value=4k7
R42 "RES_0201_4k7" RES_0201_UN1Q 58.4,37.97 r90 bottom value=4k7
R43 "RES_0201_4k7" RES_0201_UN1Q 60.508,37.97 r90 bottom value=4k7
R44 "RES_0201_4k7" RES_0201_UN1Q 59.949,37.97 r90 bottom value=4k7
U1 "MIMX8ML8CVNKZAB" BGA548C50P29X29_1500X1500X148 31.464,19.52 r180 top
U2 "MT53E2G32D4DE-046 AAT:C" BGA200C65P12X22_1000X1450X114 47.625,20.495 r0 top
U3 "SM662PBF BFS" GA153C50P14X14_1150X1300X120 11.993,17.592 r270 top
U4 "MT25QU256ABA1EW7-0SIT" W-PDFN-8MLP8_W7_MRN 13.064,7.843 r0 top
U5 "PCA9450_HVQFN56P_A" QFN57P40_700X700X100NXP 11.755,35.906 r0 top
Y1 "XTAL_24M_10ppm_9pF_+105C" XTAL_3225_EPSON 22.815,13.586 r180 bottom value=24MHz

## Footprints (in the part's own frame and the unit in brackets; to place one, negate y for a bottom-side part, rotate by r counter-clockwise, add the part's x,y. Pads: shape width x height; smd on the part's side, far side on the other; paste and mask are expansions set on the pad)
BGA200C65P12X22_1000X1450X114 [mm] "BGA200"
  round 0.4 smd paste+0 mask+0.05: A1(-4.4,6.825) A2(-3.6,6.825) A3(-2.8,6.825) A4(-2,6.825) A5(-1.2,6.825) A8(1.2,6.825) A9(2,6.825) A10(2.8,6.825) A11(3.6,6.825) A12(4.4,6.825) AA1(-4.4,-6.175) AA2(-3.6,-6.175) AA3(-2.8,-6.175) AA4(-2,-6.175) AA5(-1.2,-6.175) AA8(1.2,-6.175) AA9(2,-6.175) AA10(2.8,-6.175) AA11(3.6,-6.175) AA12(4.4,-6.175) AB1(-4.4,-6.825) AB2(-3.6,-6.825) AB3(-2.8,-6.825) AB4(-2,-6.825) AB5(-1.2,-6.825) AB8(1.2,-6.825) AB9(2,-6.825) AB10(2.8,-6.825) AB11(3.6,-6.825) AB12(4.4,-6.825) B1(-4.4,6.175) B2(-3.6,6.175) B3(-2.8,6.175) B4(-2,6.175) B5(-1.2,6.175) B8(1.2,6.175) B9(2,6.175) B10(2.8,6.175) B11(3.6,6.175) B12(4.4,6.175) C1(-4.4,5.525) C2(-3.6,5.525) C3(-2.8,5.525) C4(-2,5.525) C5(-1.2,5.525) C8(1.2,5.525) C9(2,5.525) C10(2.8,5.525) C11(3.6,5.525) C12(4.4,5.525) D1(-4.4,4.875) D2(-3.6,4.875) D3(-2.8,4.875) D4(-2,4.875) D5(-1.2,4.875) D8(1.2,4.875) D9(2,4.875) D10(2.8,4.875) D11(3.6,4.875) D12(4.4,4.875) E1(-4.4,4.225) E2(-3.6,4.225) E3(-2.8,4.225) E4(-2,4.225) E5(-1.2,4.225) E8(1.2,4.225) E9(2,4.225) E10(2.8,4.225) E11(3.6,4.225) E12(4.4,4.225) F1(-4.4,3.575) F2(-3.6,3.575) F3(-2.8,3.575) F4(-2,3.575) F5(-1.2,3.575) F8(1.2,3.575) F9(2,3.575) F10(2.8,3.575) F11(3.6,3.575) F12(4.4,3.575) G1(-4.4,2.925) G2(-3.6,2.925) G3(-2.8,2.925) G4(-2,2.925) G5(-1.2,2.925) G8(1.2,2.925) G9(2,2.925) G10(2.8,2.925) G11(3.6,2.925) G12(4.4,2.925) H1(-4.4,2.275) H2(-3.6,2.275) H3(-2.8,2.275) H4(-2,2.275) H5(-1.2,2.275) H8(1.2,2.275) H9(2,2.275) H10(2.8,2.275) H11(3.6,2.275) H12(4.4,2.275) J1(-4.4,1.625) J2(-3.6,1.625) J3(-2.8,1.625) J4(-2,1.625) J5(-1.2,1.625) J8(1.2,1.625) J9(2,1.625) J10(2.8,1.625) J11(3.6,1.625) J12(4.4,1.625) K1(-4.4,0.975) K2(-3.6,0.975) K3(-2.8,0.975) K4(-2,0.975) K5(-1.2,0.975) K8(1.2,0.975) K9(2,0.975) K10(2.8,0.975) K11(3.6,0.975) K12(4.4,0.975) N1(-4.4,-0.975) N2(-3.6,-0.975) N3(-2.8,-0.975) N4(-2,-0.975) N5(-1.2,-0.975) N8(1.2,-0.975) N9(2,-0.975) N10(2.8,-0.975) N11(3.6,-0.975) N12(4.4,-0.975) P1(-4.4,-1.625) P2(-3.6,-1.625) P3(-2.8,-1.625) P4(-2,-1.625) P5(-1.2,-1.625) P8(1.2,-1.625) P9(2,-1.625) P10(2.8,-1.625) P11(3.6,-1.625) P12(4.4,-1.625) R1(-4.4,-2.275) R2(-3.6,-2.275) R3(-2.8,-2.275) R4(-2,-2.275) R5(-1.2,-2.275) R8(1.2,-2.275) R9(2,-2.275) R10(2.8,-2.275) R11(3.6,-2.275) R12(4.4,-2.275) T1(-4.4,-2.925) T2(-3.6,-2.925) T3(-2.8,-2.925) T4(-2,-2.925) T5(-1.2,-2.925) T8(1.2,-2.925) T9(2,-2.925) T10(2.8,-2.925) T11(3.6,-2.925) T12(4.4,-2.925) U1(-4.4,-3.575) U2(-3.6,-3.575) U3(-2.8,-3.575) U4(-2,-3.575) U5(-1.2,-3.575) U8(1.2,-3.575) U9(2,-3.575) U10(2.8,-3.575) U11(3.6,-3.575) U12(4.4,-3.575) V1(-4.4,-4.225) V2(-3.6,-4.225) V3(-2.8,-4.225) V4(-2,-4.225) V5(-1.2,-4.225) V8(1.2,-4.225) V9(2,-4.225) V10(2.8,-4.225) V11(3.6,-4.225) V12(4.4,-4.225) W1(-4.4,-4.875) W2(-3.6,-4.875) W3(-2.8,-4.875) W4(-2,-4.875) W5(-1.2,-4.875) W8(1.2,-4.875) W9(2,-4.875) W10(2.8,-4.875) W11(3.6,-4.875) W12(4.4,-4.875) Y1(-4.4,-5.525) Y2(-3.6,-5.525) Y3(-2.8,-5.525) Y4(-2,-5.525) Y5(-1.2,-5.525) Y8(1.2,-5.525) Y9(2,-5.525) Y10(2.8,-5.525) Y11(3.6,-5.525) Y12(4.4,-5.525)
  silkscreen extent -5,-7.25 5,7.25, body extent -5,-7.25 5,7.25, height 1.14
BGA548C50P29X29_1500X1500X148 [mm] "BGA548"
  round 0.25 smd paste+0 mask+0.05: A1(-7,7) A2(-6.5,7) A3(-6,7) A4(-5.5,7) A5(-5,7) A6(-4.5,7) A7(-4,7) A8(-3.5,7) A9(-3,7) A10(-2.5,7) A11(-2,7) A12(-1.5,7) A13(-1,7) A14(-0.5,7) A15(0,7) A16(0.5,7) A17(1,7) A18(1.5,7) A19(2,7) A20(2.5,7) A21(3,7) A22(3.5,7) A23(4,7) A24(4.5,7) A25(5,7) A26(5.5,7) A27(6,7) A28(6.5,7) A29(7,7) AA1(-7,-3) AA2(-6.5,-3) AA3(-6,-3) AA4(-5.5,-3) AA5(-5,-3) AA6(-4.5,-3) AA7(-4,-3) AA8(-3.5,-3) AA10(-2.5,-3) AA11(-2,-3) AA14(-0.5,-3) AA16(0.5,-3) AA19(2,-3) AA20(2.5,-3) AA22(3.5,-3) AA23(4,-3) AA24(4.5,-3) AA25(5,-3) AA26(5.5,-3) AA27(6,-3) AA28(6.5,-3) AA29(7,-3) AB1(-7,-3.5) AB2(-6.5,-3.5) AB8(-3.5,-3.5) AB10(-2.5,-3.5) AB12(-1.5,-3.5) AB14(-0.5,-3.5) AB16(0.5,-3.5) AB18(1.5,-3.5) AB20(2.5,-3.5) AB22(3.5,-3.5) AB28(6.5,-3.5) AB29(7,-3.5) AC1(-7,-4) AC2(-6.5,-4) AC3(-6,-4) AC4(-5.5,-4) AC5(-5,-4) AC6(-4.5,-4) AC8(-3.5,-4) AC10(-2.5,-4) AC12(-1.5,-4) AC14(-0.5,-4) AC16(0.5,-4) AC18(1.5,-4) AC20(2.5,-4) AC22(3.5,-4) AC24(4.5,-4) AC25(5,-4) AC26(5.5,-4) AC27(6,-4) AC28(6.5,-4) AC29(7,-4) AD1(-7,-4.5) AD2(-6.5,-4.5) AD6(-4.5,-4.5) AD8(-3.5,-4.5) AD10(-2.5,-4.5) AD12(-1.5,-4.5) AD14(-0.5,-4.5) AD16(0.5,-4.5) AD18(1.5,-4.5) AD20(2.5,-4.5) AD22(3.5,-4.5) AD24(4.5,-4.5) AD28(6.5,-4.5) AD29(7,-4.5) AE1(-7,-5) AE2(-6.5,-5) AE3(-6,-5) AE4(-5.5,-5) AE6(-4.5,-5) AE8(-3.5,-5) AE10(-2.5,-5) AE12(-1.5,-5) AE14(-0.5,-5) AE16(0.5,-5) AE18(1.5,-5) AE20(2.5,-5) AE22(3.5,-5) AE24(4.5,-5) AE26(5.5,-5) AE27(6,-5) AE28(6.5,-5) AE29(7,-5) AF1(-7,-5.5) AF2(-6.5,-5.5) AF4(-5.5,-5.5) AF6(-4.5,-5.5) AF8(-3.5,-5.5) AF10(-2.5,-5.5) AF12(-1.5,-5.5) AF14(-0.5,-5.5) AF16(0.5,-5.5) AF18(1.5,-5.5) AF20(2.5,-5.5) AF22(3.5,-5.5) AF24(4.5,-5.5) AF26(5.5,-5.5) AF28(6.5,-5.5) AF29(7,-5.5) AG1(-7,-6) AG2(-6.5,-6) AG4(-5.5,-6) AG6(-4.5,-6) AG8(-3.5,-6) AG10(-2.5,-6) AG12(-1.5,-6) AG14(-0.5,-6) AG16(0.5,-6) AG18(1.5,-6) AG20(2.5,-6) AG22(3.5,-6) AG24(4.5,-6) AG26(5.5,-6) AG28(6.5,-6) AG29(7,-6) AH1(-7,-6.5) AH2(-6.5,-6.5) AH3(-6,-6.5) AH4(-5.5,-6.5) AH5(-5,-6.5) AH6(-4.5,-6.5) AH7(-4,-6.5) AH8(-3.5,-6.5) AH9(-3,-6.5) AH10(-2.5,-6.5) AH11(-2,-6.5) AH12(-1.5,-6.5) AH13(-1,-6.5) AH14(-0.5,-6.5) AH15(0,-6.5) AH16(0.5,-6.5) AH17(1,-6.5) AH18(1.5,-6.5) AH19(2,-6.5) AH20(2.5,-6.5) AH21(3,-6.5) AH22(3.5,-6.5) AH23(4,-6.5) AH24(4.5,-6.5) AH25(5,-6.5) AH26(5.5,-6.5) AH27(6,-6.5) AH28(6.5,-6.5) AH29(7,-6.5) AJ1(-7,-7) AJ2(-6.5,-7) AJ3(-6,-7) AJ4(-5.5,-7) AJ5(-5,-7) AJ6(-4.5,-7) AJ7(-4,-7) AJ8(-3.5,-7) AJ9(-3,-7) AJ10(-2.5,-7) AJ11(-2,-7) AJ12(-1.5,-7) AJ13(-1,-7) AJ14(-0.5,-7) AJ15(0,-7) AJ16(0.5,-7) AJ17(1,-7) AJ18(1.5,-7) AJ19(2,-7) AJ20(2.5,-7) AJ21(3,-7) AJ22(3.5,-7) AJ23(4,-7) AJ24(4.5,-7) AJ25(5,-7) AJ26(5.5,-7) AJ27(6,-7) AJ28(6.5,-7) AJ29(7,-7) B1(-7,6.5) B2(-6.5,6.5) B3(-6,6.5) B4(-5.5,6.5) B5(-5,6.5) B6(-4.5,6.5) B7(-4,6.5) B8(-3.5,6.5) B9(-3,6.5) B10(-2.5,6.5) B11(-2,6.5) B12(-1.5,6.5) B13(-1,6.5) B14(-0.5,6.5) B15(0,6.5) B16(0.5,6.5) B17(1,6.5) B18(1.5,6.5) B19(2,6.5) B20(2.5,6.5) B21(3,6.5) B22(3.5,6.5) B23(4,6.5) B24(4.5,6.5) B25(5,6.5) B26(5.5,6.5) B27(6,6.5) B28(6.5,6.5) B29(7,6.5) C1(-7,6) C2(-6.5,6) C4(-5.5,6) C6(-4.5,6) C8(-3.5,6) C10(-2.5,6) C12(-1.5,6) C14(-0.5,6) C16(0.5,6) C18(1.5,6) C20(2.5,6) C22(3.5,6) C24(4.5,6) C26(5.5,6) C28(6.5,6) C29(7,6) D1(-7,5.5) D2(-6.5,5.5) D4(-5.5,5.5) D6(-4.5,5.5) D8(-3.5,5.5) D10(-2.5,5.5) D12(-1.5,5.5) D14(-0.5,5.5) D16(0.5,5.5) D18(1.5,5.5) D20(2.5,5.5) D22(3.5,5.5) D24(4.5,5.5) D26(5.5,5.5) D28(6.5,5.5) D29(7,5.5) E1(-7,5) E2(-6.5,5) E3(-6,5) E4(-5.5,5) E6(-4.5,5) E8(-3.5,5) E10(-2.5,5) E12(-1.5,5) E14(-0.5,5) E16(0.5,5) E18(1.5,5) E20(2.5,5) E22(3.5,5) E24(4.5,5) E26(5.5,5) E27(6,5) E28(6.5,5) E29(7,5) F1(-7,4.5) F2(-6.5,4.5) F6(-4.5,4.5) F8(-3.5,4.5) F10(-2.5,4.5) F12(-1.5,4.5) F14(-0.5,4.5) F16(0.5,4.5) F18(1.5,4.5) F20(2.5,4.5) F22(3.5,4.5) F24(4.5,4.5) F28(6.5,4.5) F29(7,4.5) G1(-7,4) G2(-6.5,4) G3(-6,4) G4(-5.5,4) G5(-5,4) G6(-4.5,4) G8(-3.5,4) G10(-2.5,4) G12(-1.5,4) G14(-0.5,4) G16(0.5,4) G18(1.5,4) G20(2.5,4) G22(3.5,4) G24(4.5,4) G25(5,4) G26(5.5,4) G27(6,4) G28(6.5,4) G29(7,4) H1(-7,3.5) H2(-6.5,3.5) H8(-3.5,3.5) H10(-2.5,3.5) H12(-1.5,3.5) H14(-0.5,3.5) H16(0.5,3.5) H18(1.5,3.5) H20(2.5,3.5) H22(3.5,3.5) H28(6.5,3.5) H29(7,3.5) J1(-7,3) J2(-6.5,3) J3(-6,3) J4(-5.5,3) J5(-5,3) J6(-4.5,3) J7(-4,3) J8(-3.5,3) J10(-2.5,3) J11(-2,3) J14(-0.5,3) J16(0.5,3) J19(2,3) J20(2.5,3) J22(3.5,3) J23(4,3) J24(4.5,3) J25(5,3) J26(5.5,3) J27(6,3) J28(6.5,3) J29(7,3) K1(-7,2.5) K2(-6.5,2.5) K10(-2.5,2.5) K11(-2,2.5) K14(-0.5,2.5) K15(0,2.5) K16(0.5,2.5) K19(2,2.5) K20(2.5,2.5) K28(6.5,2.5) K29(7,2.5) L1(-7,2) L2(-6.5,2) L3(-6,2) L4(-5.5,2) L5(-5,2) L6(-4.5,2) L7(-4,2) L8(-3.5,2) L9(-3,2) L10(-2.5,2) L11(-2,2) L12(-1.5,2) L13(-1,2) L14(-0.5,2) L16(0.5,2) L17(1,2) L18(1.5,2) L19(2,2) L20(2.5,2) L21(3,2) L22(3.5,2) L23(4,2) L24(4.5,2) L25(5,2) L26(5.5,2) L27(6,2) L28(6.5,2) L29(7,2) M1(-7,1.5) M2(-6.5,1.5) M11(-2,1.5) M14(-0.5,1.5) M16(0.5,1.5) M19(2,1.5) M28(6.5,1.5) M29(7,1.5) N1(-7,1) N2(-6.5,1) N3(-6,1) N4(-5.5,1) N5(-5,1) N6(-4.5,1) N7(-4,1) N8(-3.5,1) N9(-3,1) N10(-2.5,1) N11(-2,1) N12(-1.5,1) N13(-1,1) N14(-0.5,1) N15(0,1) N16(0.5,1) N17(1,1) N18(1.5,1) N19(2,1) N20(2.5,1) N21(3,1) N22(3.5,1) N23(4,1) N24(4.5,1) N25(5,1) N26(5.5,1) N27(6,1) N28(6.5,1) N29(7,1) P1(-7,0.5) P2(-6.5,0.5) P11(-2,0.5) P14(-0.5,0.5) P16(0.5,0.5) P19(2,0.5) P28(6.5,0.5) P29(7,0.5) R1(-7,0) R2(-6.5,0) R3(-6,0) R4(-5.5,0) R5(-5,0) R6(-4.5,0) R7(-4,0) R8(-3.5,0) R9(-3,0) R10(-2.5,0) R11(-2,0) R12(-1.5,0) R13(-1,0) R14(-0.5,0) R16(0.5,0) R17(1,0) R18(1.5,0) R19(2,0) R20(2.5,0) R21(3,0) R22(3.5,0) R23(4,0) R24(4.5,0) R25(5,0) R26(5.5,0) R27(6,0) R28(6.5,0) R29(7,0) T1(-7,-0.5) T2(-6.5,-0.5) T11(-2,-0.5) T14(-0.5,-0.5) T16(0.5,-0.5) T19(2,-0.5) T28(6.5,-0.5) T29(7,-0.5) U1(-7,-1) U2(-6.5,-1) U3(-6,-1) U4(-5.5,-1) U5(-5,-1) U6(-4.5,-1) U7(-4,-1) U8(-3.5,-1) U9(-3,-1) U10(-2.5,-1) U11(-2,-1) U12(-1.5,-1) U13(-1,-1) U14(-0.5,-1) U15(0,-1) U16(0.5,-1) U17(1,-1) U18(1.5,-1) U19(2,-1) U20(2.5,-1) U21(3,-1) U22(3.5,-1) U23(4,-1) U24(4.5,-1) U25(5,-1) U26(5.5,-1) U27(6,-1) U28(6.5,-1) U29(7,-1) V1(-7,-1.5) V2(-6.5,-1.5) V11(-2,-1.5) V14(-0.5,-1.5) V16(0.5,-1.5) V19(2,-1.5) V28(6.5,-1.5) V29(7,-1.5) W1(-7,-2) W2(-6.5,-2) W3(-6,-2) W4(-5.5,-2) W5(-5,-2) W6(-4.5,-2) W7(-4,-2) W8(-3.5,-2) W9(-3,-2) W10(-2.5,-2) W11(-2,-2) W12(-1.5,-2) W13(-1,-2) W14(-0.5,-2) W16(0.5,-2) W17(1,-2) W18(1.5,-2) W19(2,-2) W20(2.5,-2) W21(3,-2) W22(3.5,-2) W23(4,-2) W24(4.5,-2) W25(5,-2) W26(5.5,-2) W27(6,-2) W28(6.5,-2) W29(7,-2) Y1(-7,-2.5) Y2(-6.5,-2.5) Y10(-2.5,-2.5) Y11(-2,-2.5) Y14(-0.5,-2.5) Y15(0,-2.5) Y16(0.5,-2.5) Y19(2,-2.5) Y20(2.5,-2.5) Y28(6.5,-2.5) Y29(7,-2.5)
  silkscreen extent -7.5,-7.5 7.5,7.5, body extent -7.5,-7.5 7.5,7.5, height 1.48
CAP_0201_UN1Q [mm] "Chip Capacitor 0201"
  rect 0.34x0.34 smd mask+0.05: 1(-0.29,0) 2(0.29,0)
  silkscreen extent -0.48,-0.18 0.48,0.18, body extent -0.3,-0.15 0.3,0.15, height 0.33
CAP_0402_H09W07_UN1Q [mm] "Chip Capacitor 0402 BIG"
  rect 0.52x0.7 smd paste+0 mask+0.05: 1(-0.45,0) 2(0.45,0)
  silkscreen extent -0.67,-0.35 0.67,0.35, body extent -0.55,-0.35 0.55,0.35, height 0.9
CAP_0402_UN1Q [mm] "Chip Capacitor 0402"
  rect 0.52x0.52 smd paste+0 mask+0.05: 1(-0.4,0) 2(0.4,0)
  silkscreen extent -0.67,-0.28 0.67,0.28, body extent -0.5,-0.25 0.5,0.25, height 0.6
CAP_0603_UN1Q [mm] "Chip Capacitor 0603"
  rect 0.7x0.9 smd paste+0 mask+0.05: 1(-0.7,0) 2(0.7,0)
  silkscreen extent -0.87,-0.5 0.87,0.5, body extent -0.8,-0.45 0.8,0.45, height 1
CM8V32768TA020125_MC [mm] "2.0 x 1.2 x 0.60 mm"
  rect 0.8x1.5 smd paste+0 mask+0.06: 1(-0.75,0) 2(0.75,0)
  silkscreen extent -1.05,-0.65 1.02,0.65, body extent -1,-0.6 1,0.6, height 0.63
FERR_BLM15KD [mm] "Chip Resistor, Body 1.0x0.5mm, IPC High Density"
  rect 0.45x0.55 smd mask+0.05: 1(-0.45,0) 2(0.45,0)
  Top Layer keep-out region: -0.152,-0.276 0.148,-0.276 0.148,0.274 -0.152,0.274
  silkscreen extent -0.67,-0.3 0.67,0.3, body extent -0.65,-0.27 0.65,0.28, height 0.55
GA153C50P14X14_1150X1300X120 [mm]
  round 0.29 smd paste+0 mask+0.05: A1(-3.25,3.25) A2(-2.75,3.25) A3(-2.25,3.25) A4(-1.75,3.25) A5(-1.25,3.25) A6(-0.75,3.25) A7(-0.25,3.25) A8(0.25,3.25) A9(0.75,3.25) A10(1.25,3.25) A11(1.75,3.25) A12(2.25,3.25) A13(2.75,3.25) A14(3.25,3.25) B1(-3.25,2.75) B2(-2.75,2.75) B3(-2.25,2.75) B4(-1.75,2.75) B5(-1.25,2.75) B6(-0.75,2.75) B7(-0.25,2.75) B8(0.25,2.75) B9(0.75,2.75) B10(1.25,2.75) B11(1.75,2.75) B12(2.25,2.75) B13(2.75,2.75) B14(3.25,2.75) C1(-3.25,2.25) C2(-2.75,2.25) C3(-2.25,2.25) C4(-1.75,2.25) C5(-1.25,2.25) C6(-0.75,2.25) C7(-0.25,2.25) C8(0.25,2.25) C9(0.75,2.25) C10(1.25,2.25) C11(1.75,2.25) C12(2.25,2.25) C13(2.75,2.25) C14(3.25,2.25) D1(-3.25,1.75) D2(-2.75,1.75) D3(-2.25,1.75) D4(-1.75,1.75) D12(2.25,1.75) D13(2.75,1.75) D14(3.25,1.75) E1(-3.25,1.25) E2(-2.75,1.25) E3(-2.25,1.25) E5(-1.25,1.25) E6(-0.75,1.25) E7(-0.25,1.25) E8(0.25,1.25) E9(0.75,1.25) E10(1.25,1.25) E12(2.25,1.25) E13(2.75,1.25) E14(3.25,1.25) F1(-3.25,0.75) F2(-2.75,0.75) F3(-2.25,0.75) F5(-1.25,0.75) F10(1.25,0.75) F12(2.25,0.75) F13(2.75,0.75) F14(3.25,0.75) G1(-3.25,0.25) G2(-2.75,0.25) G3(-2.25,0.25) G5(-1.25,0.25) G10(1.25,0.25) G12(2.25,0.25) G13(2.75,0.25) G14(3.25,0.25) H1(-3.25,-0.25) H2(-2.75,-0.25) H3(-2.25,-0.25) H5(-1.25,-0.25) H10(1.25,-0.25) H12(2.25,-0.25) H13(2.75,-0.25) H14(3.25,-0.25) J1(-3.25,-0.75) J2(-2.75,-0.75) J3(-2.25,-0.75) J5(-1.25,-0.75) J10(1.25,-0.75) J12(2.25,-0.75) J13(2.75,-0.75) J14(3.25,-0.75) K1(-3.25,-1.25) K2(-2.75,-1.25) K3(-2.25,-1.25) K5(-1.25,-1.25) K6(-0.75,-1.25) K7(-0.25,-1.25) K8(0.25,-1.25) K9(0.75,-1.25) K10(1.25,-1.25) K12(2.25,-1.25) K13(2.75,-1.25) K14(3.25,-1.25) L1(-3.25,-1.75) L2(-2.75,-1.75) L3(-2.25,-1.75) L12(2.25,-1.75) L13(2.75,-1.75) L14(3.25,-1.75) M1(-3.25,-2.25) M2(-2.75,-2.25) M3(-2.25,-2.25) M4(-1.75,-2.25) M5(-1.25,-2.25) M6(-0.75,-2.25) M7(-0.25,-2.25) M8(0.25,-2.25) M9(0.75,-2.25) M10(1.25,-2.25) M11(1.75,-2.25) M12(2.25,-2.25) M13(2.75,-2.25) M14(3.25,-2.25) N1(-3.25,-2.75) N2(-2.75,-2.75) N3(-2.25,-2.75) N4(-1.75,-2.75) N5(-1.25,-2.75) N6(-0.75,-2.75) N7(-0.25,-2.75) N8(0.25,-2.75) N9(0.75,-2.75) N10(1.25,-2.75) N11(1.75,-2.75) N12(2.25,-2.75) N13(2.75,-2.75) N14(3.25,-2.75) P1(-3.25,-3.25) P2(-2.75,-3.25) P3(-2.25,-3.25) P4(-1.75,-3.25) P5(-1.25,-3.25) P6(-0.75,-3.25) P7(-0.25,-3.25) P8(0.25,-3.25) P9(0.75,-3.25) P10(1.25,-3.25) P11(1.75,-3.25) P12(2.25,-3.25) P13(2.75,-3.25) P14(3.25,-3.25)
  silkscreen extent -5.75,-6.5 5.75,6.5, body extent -5.75,-6.5 5.75,6.5, height 1.21
HIROSE_DF40C-100DP-0.4V(51) [mm]
  rect 0.23x0.66 smd paste-1 mask+0.102: 1(-9.8,-1.355) 2(-9.8,1.355) 3(-9.4,-1.355) 4(-9.4,1.355) 5(-9,-1.355) 6(-9,1.355) 7(-8.6,-1.355) 8(-8.6,1.355) 9(-8.2,-1.355) 10(-8.2,1.355) 11(-7.8,-1.355) 12(-7.8,1.355) 13(-7.4,-1.355) 14(-7.4,1.355) 15(-7,-1.355) 16(-7,1.355) 17(-6.6,-1.355) 18(-6.6,1.355) 19(-6.2,-1.355) 20(-6.2,1.355) 21(-5.8,-1.355) 22(-5.8,1.355) 23(-5.4,-1.355) 24(-5.4,1.355) 25(-5,-1.355) 26(-5,1.355) 27(-4.6,-1.355) 28(-4.6,1.355) 29(-4.2,-1.355) 30(-4.2,1.355) 31(-3.8,-1.355) 32(-3.8,1.355) 33(-3.4,-1.355) 34(-3.4,1.355) 35(-3,-1.355) 36(-3,1.355) 37(-2.6,-1.355) 38(-2.6,1.355) 39(-2.2,-1.355) 40(-2.2,1.355) 41(-1.8,-1.355) 42(-1.8,1.355) 43(-1.4,-1.355) 44(-1.4,1.355) 45(-1,-1.355) 46(-1,1.355) 47(-0.6,-1.355) 48(-0.6,1.355) 49(-0.2,-1.355) 50(-0.2,1.355) 51(0.2,-1.355) 52(0.2,1.355) 53(0.6,-1.355) 54(0.6,1.355) 55(1,-1.355) 56(1,1.355) 57(1.4,-1.355) 58(1.4,1.355) 59(1.8,-1.355) 60(1.8,1.355) 61(2.2,-1.355) 62(2.2,1.355) 63(2.6,-1.355) 64(2.6,1.355) 65(3,-1.355) 66(3,1.355) 67(3.4,-1.355) 68(3.4,1.355) 69(3.8,-1.355) 70(3.8,1.355) 71(4.2,-1.355) 72(4.2,1.355) 73(4.6,-1.355) 74(4.6,1.355) 75(5,-1.355) 76(5,1.355) 77(5.4,-1.355) 78(5.4,1.355) 79(5.8,-1.355) 80(5.8,1.355) 81(6.2,-1.355) 82(6.2,1.355) 83(6.6,-1.355) 84(6.6,1.355) 85(7,-1.355) 86(7,1.355) 87(7.4,-1.355) 88(7.4,1.355) 89(7.8,-1.355) 90(7.8,1.355) 91(8.2,-1.355) 92(8.2,1.355) 93(8.6,-1.355) 94(8.6,1.355) 95(9,-1.355) 96(9,1.355) 97(9.4,-1.355) 98(9.4,1.355) 99(9.8,-1.355) 100(9.8,1.355)
  rect 0.35x0.66 smd paste-1 mask+0.102: S1(-10.275,-1.355) S2(-10.275,1.355) S3(10.275,-1.355) S4(10.275,1.355)
  silkscreen extent -10.76,-2.35 10.76,0.92, body extent -10.76,-1.52 10.76,1.45, height 0.49
IND_VLS2520 [mm]
  rect 0.6x2 smd paste+0 mask+0.05: 1(-0.95,0) 2(0.95,0)
  silkscreen extent -1.25,-1 1.25,1, body extent -1.25,-1 1.25,1, height 1.2
PTP_0.4MM [mm] "ProductionTest Point, Circular, 0.4mm. Flying probe. Use 1mm pitch."
  round 0.4 smd paste-0.5 mask+0.05: 1(0,0)
  silkscreen extent -0.2,-0.2 0.2,0.2, body extent -0.2,-0.19 0.2,0.21, height 0.01
QFN57P40_700X700X100NXP [mm] "QFN56 + pad NXP"
  rect 0.9x0.2 smd paste+0 mask+0.05: 1(-3.45,2.6) 2(-3.45,2.2) 3(-3.45,1.8) 4(-3.45,1.4) 5(-3.45,1) 6(-3.45,0.6) 7(-3.45,0.2) 8(-3.45,-0.2) 9(-3.45,-0.6) 10(-3.45,-1) 11(-3.45,-1.4) 12(-3.45,-1.8) 13(-3.45,-2.2) 14(-3.45,-2.6) 29(3.45,-2.6) 30(3.45,-2.2) 31(3.45,-1.8) 32(3.45,-1.4) 33(3.45,-1) 34(3.45,-0.6) 35(3.45,-0.2) 36(3.45,0.2) 37(3.45,0.6) 38(3.45,1) 39(3.45,1.4) 40(3.45,1.8) 41(3.45,2.2) 42(3.45,2.6)
  rect 0.2x0.9 smd paste+0 mask+0.05: 15(-2.6,-3.45) 16(-2.2,-3.45) 17(-1.8,-3.45) 18(-1.4,-3.45) 19(-1,-3.45) 20(-0.6,-3.45) 21(-0.2,-3.45) 22(0.2,-3.45) 23(0.6,-3.45) 24(1,-3.45) 25(1.4,-3.45) 26(1.8,-3.45) 27(2.2,-3.45) 28(2.6,-3.45) 43(2.6,3.45) 44(2.2,3.45) 45(1.8,3.45) 46(1.4,3.45) 47(1,3.45) 48(0.6,3.45) 49(0.2,3.45) 50(-0.2,3.45) 51(-0.6,3.45) 52(-1,3.45) 53(-1.4,3.45) 54(-1.8,3.45) 55(-2.2,3.45) 56(-2.6,3.45)
  rect 4.8x4.8 smd paste-3 mask+0.05: 57(0,0)
  silkscreen extent -3.5,-3.5 3.5,3.5, body extent -3.5,-3.5 3.5,3.5, height 1
RES_0201_UN1Q [mm] "Chip Resistor, 0.6x0.3mm"
  rect 0.34x0.34 smd mask+0.05: 1(-0.29,0) 2(0.29,0)
  silkscreen extent -0.48,-0.18 0.48,0.18, body extent -0.3,-0.15 0.3,0.15, height 0.26
TP_1X2MM_UN1Q [mm] "Test Point 1 mm x 2 mm"
  rect 1x2 smd paste-5 mask+0.1: 1(0,0)
  silkscreen extent -0.6,-1.1 0.6,1.1, body extent -0.5,-1 0.5,1, height 0.03
W-PDFN-8MLP8_W7_MRN [mil]
  rect 38x16 smd paste+0 mask+0: 1(-113,75) 2(-113,25) 3(-113,-25) 4(-113,-75) 5(113,-75) 6(113,-25) 7(113,25) 8(113,75)
  rect 122x122 smd paste+0 mask+0: 9(0,0)
  silkscreen extent -188,-106 125,106, body extent -120,-101 120,101, height 32
XTAL_3225_EPSON [mm] "Epson TSX-3225 3.2mm x 2.5mm"
  rect 1x1.2 smd paste-0.1 mask+0.05: 1(-0.75,1) 2(-0.75,-1) 3(0.75,-1) 4(0.75,1)
  silkscreen extent -1.33,-1.68 1.33,1.68, body extent -1.25,-1.6 1.25,1.6, height 0.6